# EAGLE board Badge_Motor-ExhibitionLarge (EAGLE 6.3)
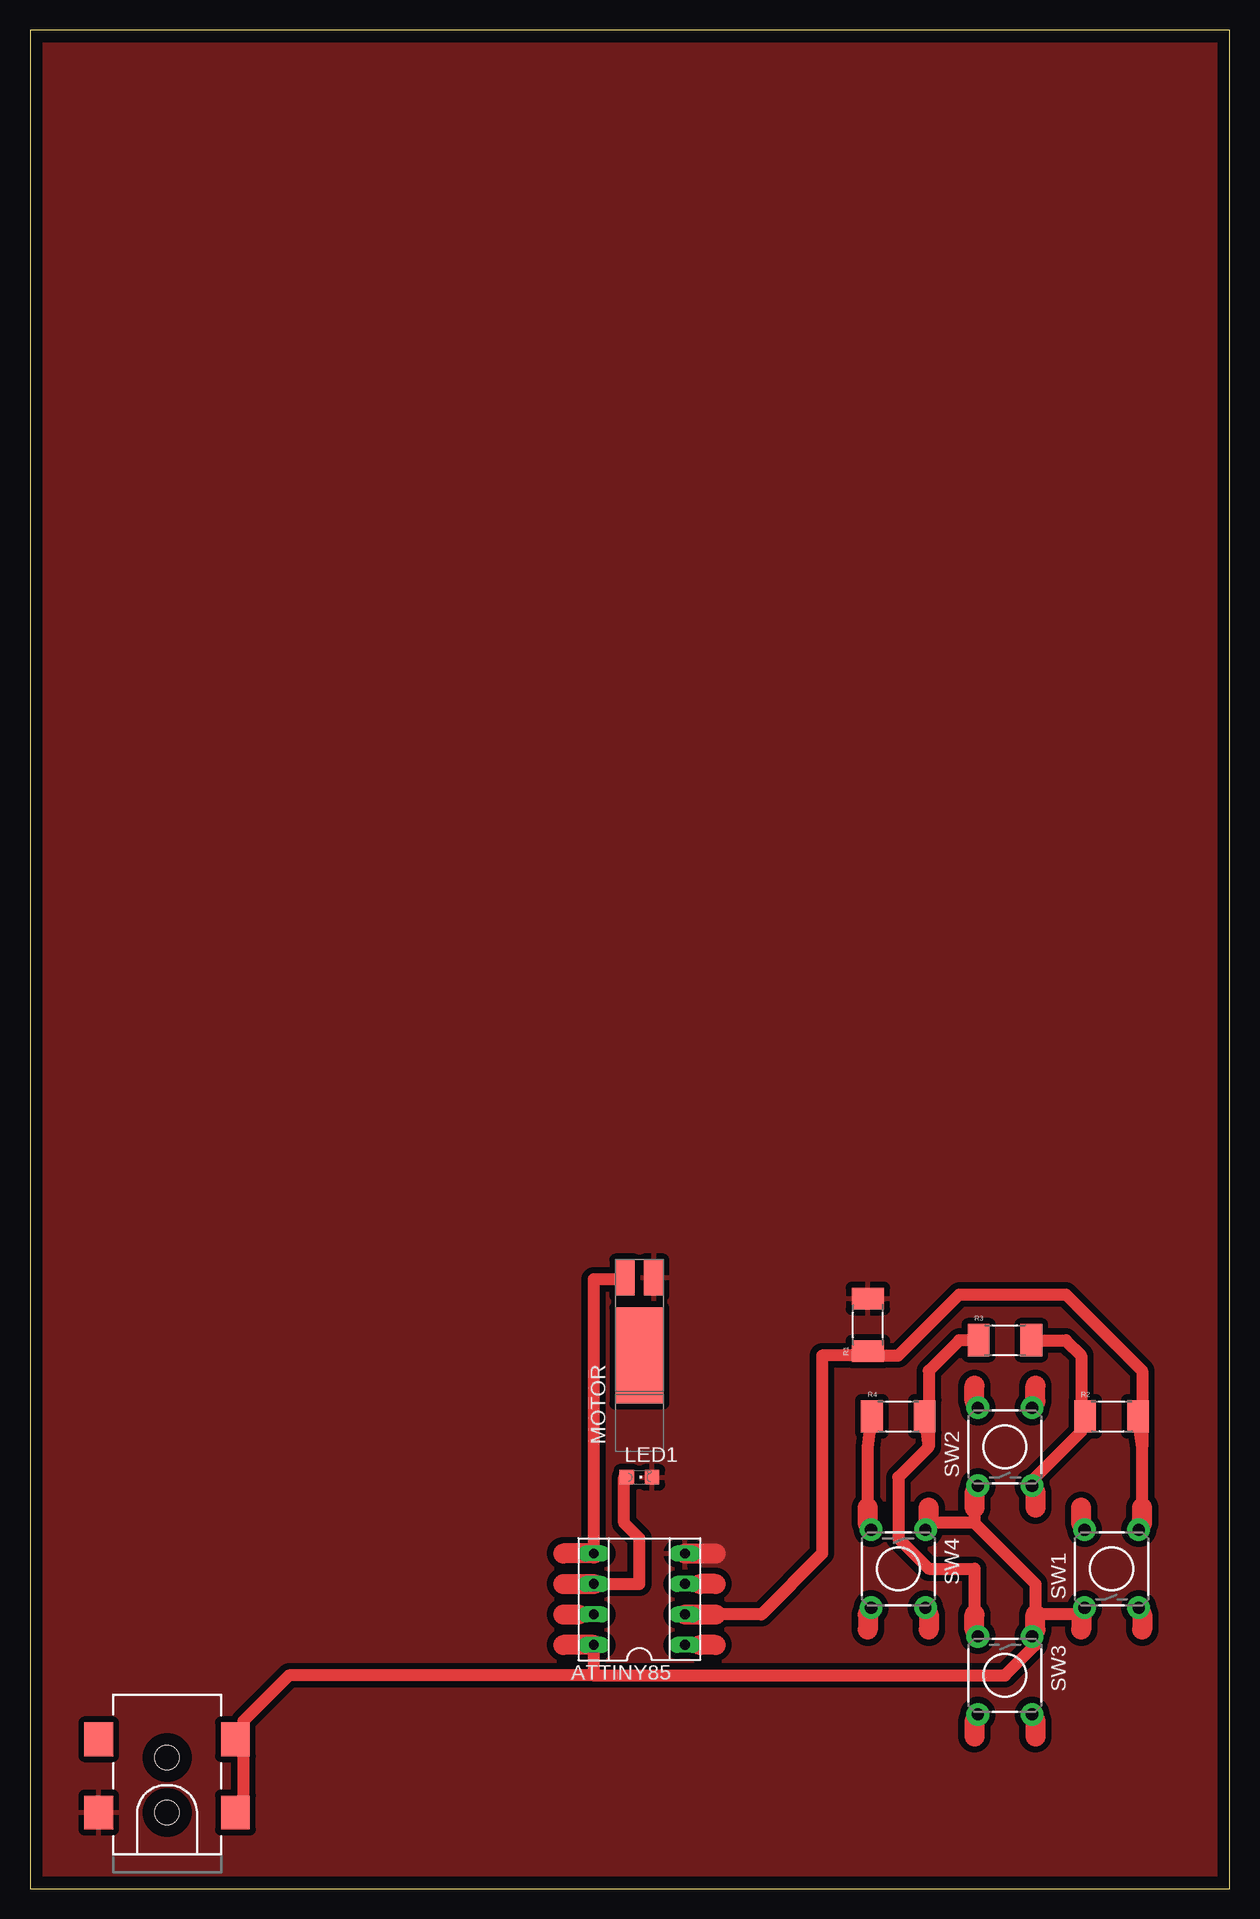
[diagram p0: board, top side]

Size 100 x 154.93 mm. Coordinates in mm from the lower left corner, seen from the top.
Outline: 0,0 100,0 100,154.93 0,154.93 0,0
Copper layers (1*16): Top 0.035mm / dielectric 1.5mm / Bottom 0.035mm
Design rules "Basic_Fall2012 *": minimum track width 40mil, minimum drill 24mil, track to track 20mil, track to pad 20mil, pad to pad 20mil, via to via 20mil, smd to smd 20mil, copper to edge 40mil, drill to drill 8mil, minimum pad ring 10mil, minimum via ring 8mil, stop-mask expansion 4mil, vias tented up to drill 0mil, thermal gap 20mil

## Footprints (pad centres in the part's own frame; a part is rotated, then mirrored left to right if it is on the bottom)
SOCKET-08 = drill 0.813 long: 1 -3.81,-3.81; 2 -1.27,-3.81; 3 1.27,-3.81; 4 3.81,-3.81; 5 3.81,3.81; 6 1.27,3.81; 7 -1.27,3.81; 8 -3.81,3.81
CHIPLED_0805 = smd 1.2 x 1.2: A 0,-1.05; C 0,1.05
VIB-MOTOR = smd 3 x 1.6: 1 6.5,-1.2; 2 6.5,1.2 | smd 8 x 4: GROUND-PAD 0,0
POWER_JACK_SMD = smd 2.8 x 2.4: GND 0,-5.7; P$4 6.1,-5.7; VIN0 0,5.7; VIN1 6.1,5.7 | hole 2.032: 0,0; 4.572,0
R2010 = smd 1.8 x 2.7: 1 -2.2,0; 2 2.2,0
TACTILE-PTH = drill 1.016 pad 1.88: 1 -3.251,2.261; 2 3.251,2.261; 3 -3.251,-2.261; 4 3.251,-2.261

## Placement (x,y rotation side)
ATTINY85  [SOCKET-08]  50.8,24.13 90 top
LED1  [CHIPLED_0805]  50.8,34.29 270 top
MOTOR  VIB-MOTOR  [VIB-MOTOR]  50.8,44.45 90 top
POWER  3-5VDC  [POWER_JACK_SMD]  11.43,6.35 90 top
R1  [R2010]  69.85,46.99 90 top
R2  [R2010]  90.17,39.37 0 top
R3  [R2010]  81.28,45.72 0 top
R4  [R2010]  72.39,39.37 0 top
SW1  [TACTILE-PTH]  90.17,26.67 90 top
SW2  [TACTILE-PTH]  81.28,36.83 90 top
SW3  [TACTILE-PTH]  81.28,17.78 270 top
SW4  [TACTILE-PTH]  72.39,26.67 270 top

## Library data of the parts
ATTINY85 = ic-package
LED1 = led
MOTOR = JeffThompson
POWER R1-R4 SW1-SW4 = SparkFun

## Nets
+3V: ATTINY85.8 POWER.GND POWER.P$4 SW1.1 SW2.1 SW3.1 SW4.1
GND: ATTINY85.4 LED1.C MOTOR.1 POWER.VIN0 R1.2
N$1: ATTINY85.5 MOTOR.2
N$4: ATTINY85.2 R1.1 R2.2 SW1.4
N$5: ATTINY85.6 LED1.A
N$17: R4.1 SW4.3
N$18: R3.1 R4.2 SW3.3
N$19: R2.1 R3.2 SW2.3

## Tracks (layer width: path | path; a pad name or v marks a point on that pad's centre or on a via)
+3V
  Top 1.016: 83.82,21.59 SW3.1 83.82,20.32 81.28,17.78 46.99,17.78 | SW1.1 87.63,22.86 83.82,22.86 83.82,25.4 78.74,30.48 | 78.74,31.75 78.74,30.48 | 78.74,30.48 74.93,30.48 SW4.1 | 78.74,33.02 SW2.1 | 46.99,17.78 21.59,17.78 17.78,13.97 17.78,12.7 POWER.P$4 17.78,11.43 17.78,6.35 POWER.GND | ATTINY85.8 46.99,17.78
  Top 1.676: 74.93,30.48 74.93,31.75 | 83.82,21.59 83.82,22.86 | 87.63,22.86 87.63,21.59 | 78.74,33.02 78.74,31.75 | ATTINY85.8 44.45,20.32
GND
  Top 1.676: ATTINY85.4 57.15,27.94
  pour Top: -1.27,156.21 101.6,156.21 101.6,-1.27 -1.27,-1.27
N$1
  Top 1.016: ATTINY85.5 46.99,50.8 49.53,50.8 MOTOR.2
  Top 1.676: ATTINY85.5 44.45,27.94
N$4
  Top 1.016: 92.71,31.75 92.71,36.83 | 92.71,30.48 SW1.4 | 57.15,22.86 60.96,22.86 66.04,27.94 66.04,44.45 69.85,44.45 | 92.71,36.83 92.71,43.18 86.36,49.53 77.47,49.53 72.39,44.45 69.85,44.45 | 92.71,36.83 R2.2 | 69.85,44.45 R1.1
  Top 1.676: 92.71,30.48 92.71,31.75 | ATTINY85.2 57.15,22.86
N$5
  Top 1.016: ATTINY85.6 50.8,25.4 50.8,29.21 49.53,30.48 49.53,34.29 LED1.A
  Top 1.676: 44.45,25.4 ATTINY85.6
N$6
  Top 1.676: 69.85,22.86 69.85,21.59
N$7
  Top 1.676: 74.93,22.86 74.93,21.59
N$8
  Top 1.676: 92.71,22.86 92.71,21.59
N$9
  Top 1.676: 83.82,13.97 83.82,12.7
N$10
  Top 1.676: 78.74,13.97 78.74,12.7
N$11
  Top 1.676: 87.63,30.48 87.63,31.75
N$12
  Top 1.676: 83.82,33.02 83.82,31.75
N$13
  Top 1.676: 78.74,40.64 78.74,41.91
N$14
  Top 1.676: 83.82,40.64 83.82,41.91
N$15
  Top 1.676: 44.45,22.86 45.72,22.86
N$16
  Top 1.676: 57.15,25.4 55.88,25.4
N$17
  Top 1.016: 69.85,31.75 69.85,36.83 R4.1 | 69.85,30.48 SW4.3
  Top 1.676: 69.85,30.48 69.85,31.75
N$18
  Top 1.016: 74.93,36.83 74.93,43.18 77.47,45.72 R3.1 | 78.74,22.86 78.74,26.67 74.93,26.67 72.39,29.21 72.39,34.29 74.93,36.83 | 78.74,21.59 SW3.3 | 74.93,36.83 R4.2
  Top 1.676: 78.74,21.59 78.74,22.86
N$19
  Top 1.016: 87.63,38.1 87.63,44.45 86.36,45.72 R3.2 | 87.63,38.1 83.82,34.29 SW2.3 | 87.63,38.1 R2.1
N$20
  Top 1.676: 57.15,20.32 55.88,20.32